# Altium PCB PCB1.PcbDoc (part 1 of 2)
Units mil, origin at the board's own origin, x right, y up, seen from the top; angles counter-clockwise.
Board outline 6299.21 x 3937.01 mil, 2 copper layers (Top Layer, Bottom Layer); 110 components, 74 nets, 374 pads, 104 vias.
Unrouted connection lines stored in the file: 41.
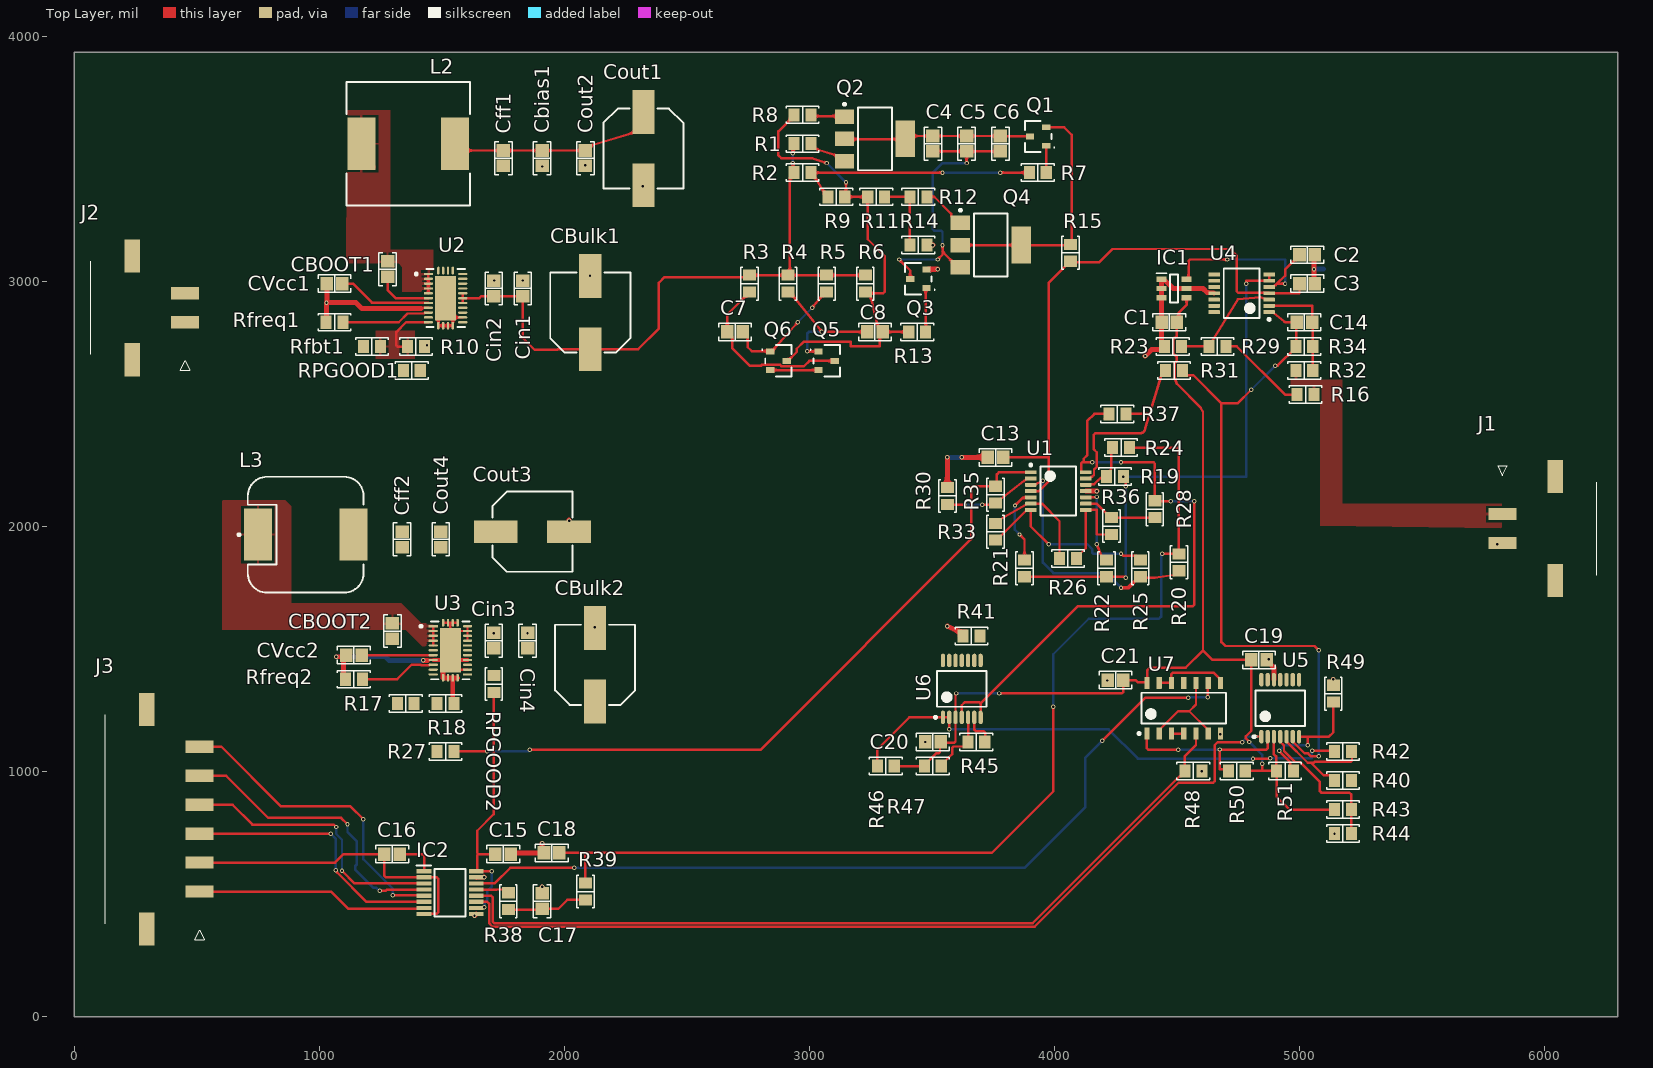
[diagram p0: Top Layer view]
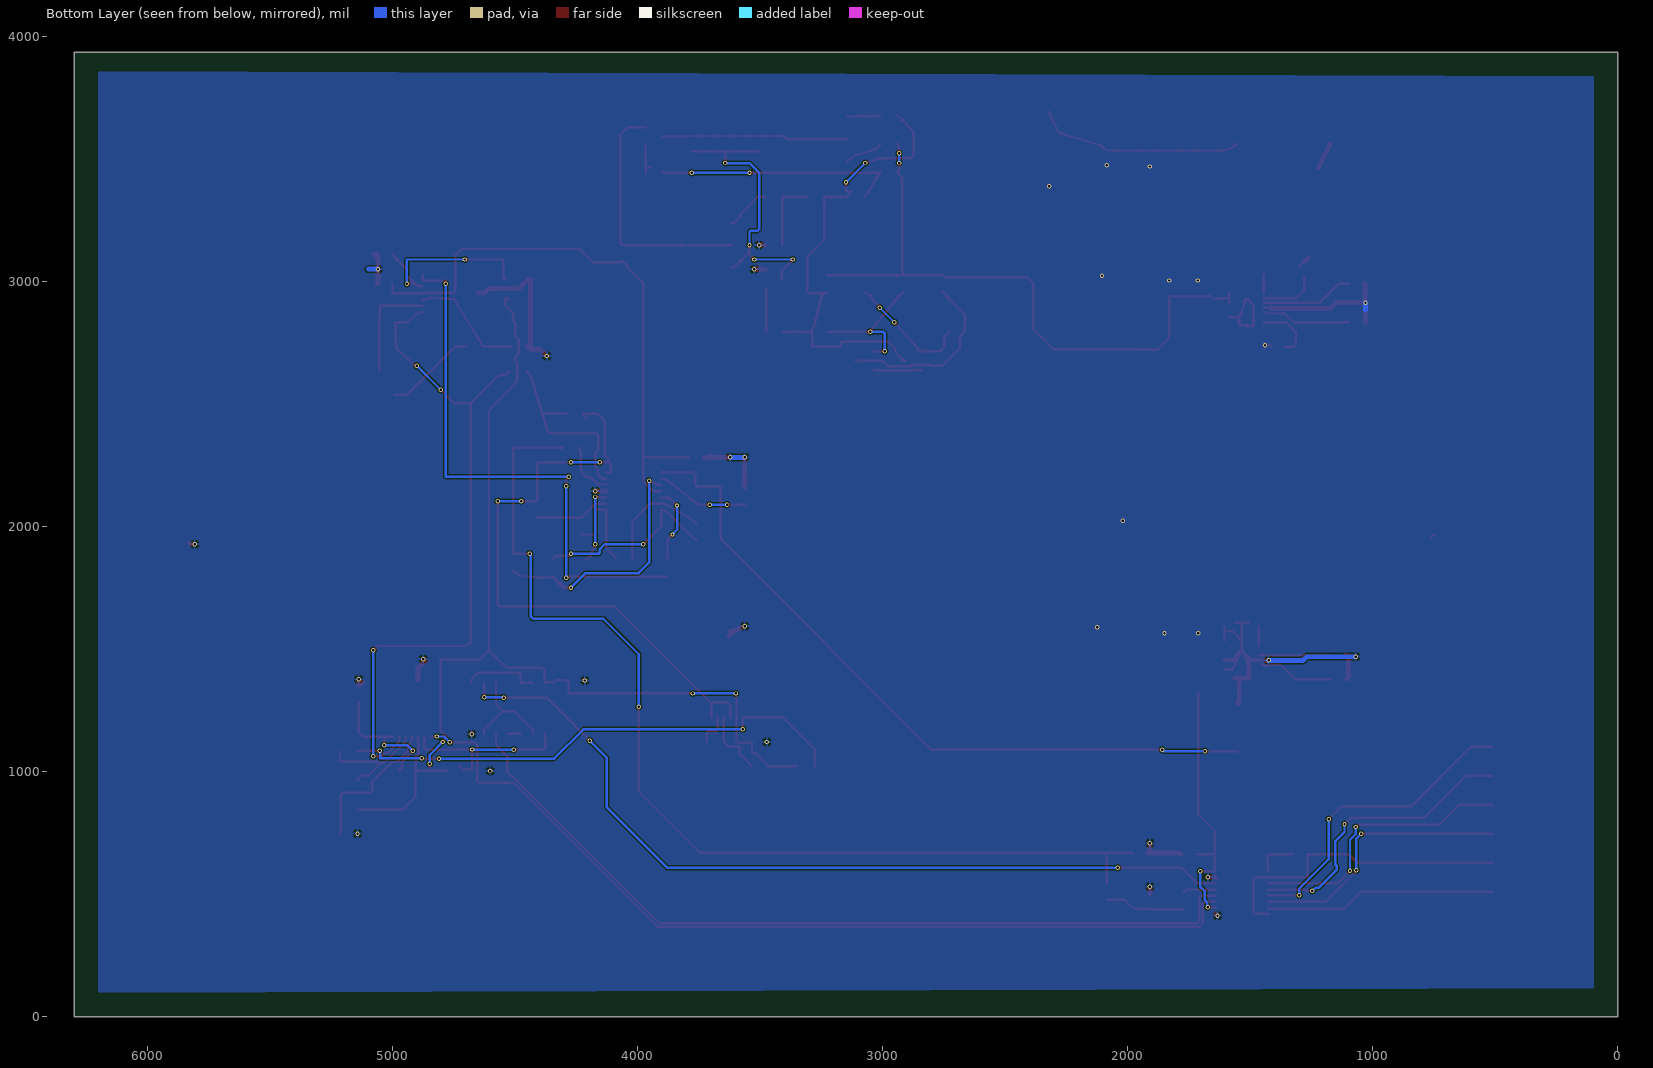
[diagram p1: Bottom Layer view, seen from below]
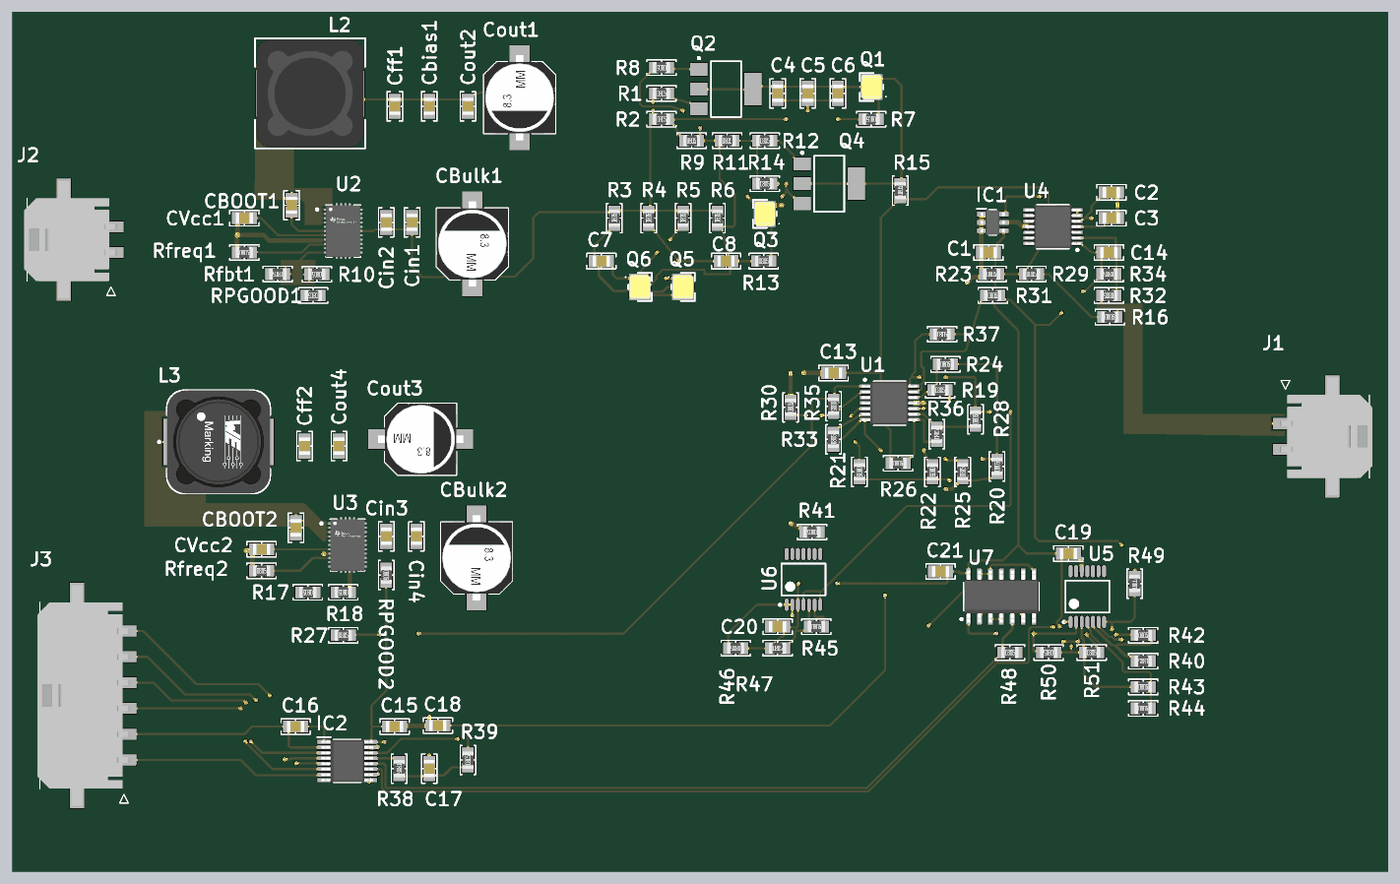
[diagram p2: 3D render of the assembled board from above, using the file's embedded part models]

## Layer stack, top to bottom
Top Solder: solder mask 0.4, Solder Resist, Dk 3.5
Top Layer: signal copper 1.4
Dielectric 1: dielectric 12.6, FR-4, Dk 4.8
Bottom Layer: signal copper 1.4
Bottom Solder: solder mask 0.4, Solder Resist, Dk 3.5

## Board outline
0,0 6299.21,0 6299.21,3937.01 0,3937.01

## Design rules (kind name [scope] priority, off if disabled: settings)
Clearance [All] p1: gap=4.92 ignorepadtopadclearanceinfootprint=FALSE
PolygonConnect [All] p1: connectstyle=Relief reliefconductorwidth=10 reliefentries=4 polygonreliefangle="90 Angle" airgapwidth=10
RoutingVias [All] p1: holewidth=10 width=18 viastyle="Through Hole" minholewidth=8 minwidth=16 maxholewidth=20 maxwidth=28
SolderMaskExpansion [All] p1: expansion=4 istentingtop=FALSE
Width [All] p1: maxlimit=20 minlimit=5 preferedwidth=10
30 further rules are at their usual default settings.

## Components (designator, comment, footprint, x,y, rotation, side; value= is the part's Value field where it differs from the comment)
C1 "0.1 µF" "CAP 0805_2012" 4468.5,2834.65 r180 top
C2 "1 µF" "CAP 0805_2012" 5031.5,3110.24 r180 top
C3 "0.1 µF" "CAP 0805_2012" 5031.5,2992.13 r180 top
C4 "1u" "CAP 0805_2012" 3503.94,3562.99 r90 top
C5 "1u" "CAP 0805_2012" 3641.73,3562.99 r90 top
C6 "1u" "CAP 0805_2012" 3779.53,3562.99 r90 top
C7 "4700 pF" "CAP 0805_2012" 2696.85,2795.28 r0 top
C8 "4700 pF" "CAP 0805_2012" 3267.72,2795.28 r0 top
C13 "0.1 µF" "CAP 0805_2012" 3759.84,2283.46 r0 top
C14 "0.13 µF" "CAP 0805_2012" 5019.69,2834.65 r180 top
C15 "0.1 µF" "CAP 0805_2012" 1750.65,664.84 r180 top
C16 "0.1 µF" "CAP 0805_2012" 1297.89,664.84 r180 top
C17 "0.1 µF" "CAP 0805_2012" 1909.45,472.44 r270 top
C18 "0.1 µF" "CAP 0805_2012" 1948.82,669.29 r0 top
C19 "0.1 µF" "CAP 0805_2012" 4834.65,1456.69 r0 top
C20 "0.1 µF" "CAP 0805_2012" 3503.94,1122.05 r0 top
C21 "0.1 µF" "CAP 0805_2012" 4249.21,1374.8 r0 top
Cbias1 "1uF" "CAP 0805_2012" 1909.45,3503.94 r90 top
CBOOT1 "0.47 µF" "CAP 0805_2012" 1279.53,3051.18 r270 top
CBOOT2 "0.47 µF" "CAP 0805_2012" 1299.21,1574.8 r270 top
CBulk1 "68 µF" "CAP ALSMD 8.3MM H10.5MM" 2106.3,2874.02 r90 top
CBulk2 "22uF" "CAP ALSMD 8.3MM H10.5MM" 2125.98,1437.01 r90 top value="68 µF"
Cff1 "11pF" "CAP 0805_2012" 1751.97,3503.94 r90 top
Cff2 "11pF" "CAP 0805_2012" 1338.58,1948.82 r90 top
Cin1 "10uF" "CAP 0805_2012" 1830.71,2972.44 r90 top
Cin2 "47nF" "CAP 0805_2012" 1712.6,2972.44 r90 top
Cin3 "10uF" "CAP 0805_2012" 1712.6,1535.43 r90 top
Cin4 "47nF" "CAP 0805_2012" 1850.39,1535.43 r90 top
Cout1 "68 µF" "CAP ALSMD 8.3MM H10.5MM" 2322.83,3543.31 r270 top
Cout2 "0.47uF" "CAP 0805_2012" 2086.61,3503.94 r90 top
Cout3 "22uF" "CAP ALSMD 8.3MM H10.5MM" 1870,1980 r0 top value="68 µF"
Cout4 "0.47uF" "CAP 0805_2012" 1496.06,1948.82 r90 top
CVcc1 "2.2uF" "CAP 0805_2012" 1062.99,2992.13 r180 top
CVcc2 "2.2uF" "CAP 0805_2012" 1141.73,1476.38 r180 top
IC1 "LT6656AIS6-2.5#TRMPBF" SOT95P280X100-6N 4488.19,2972.44 r0 top
IC2 "ISO7741QDBQQ1" SOP64P600X175-16N 1534.11,507.36 r0 top
J1 "43650-0214" 43650-02(12,13,14) 5827.95,1992.72 r90 top
J2 "43650-0214" 43650-02(12,13,14) 452.76,2893.7 r270 top
J3 "43650-0614" 43650-06(12,13,14) 511.81,807.09 r270 top
L2 "3.3 µH" "BOURNS SRR1280" 1364.17,3562.99 r0 top
L3 "2.2 µH" "WURTH WE-PD 1210" 944.88,1968.5 r0 top
Q1 "2N2222AUB" MCSM-2N2222AUB-3 3933.46,3592.52 r90 top
Q2 "PZT2907AT1G" ONSC-SOT-223-4-318E-04_V 3267.72,3582.68 r0 top
Q3 "2N2222AUB" MCSM-2N2222AUB-3 3444.88,3011.81 r90 top
Q4 "PZT2907AT1G" ONSC-SOT-223-4-318E-04_V 3740.16,3149.61 r0 top
Q5 "2N2222AUB" MCSM-2N2222AUB-3 3070.87,2677.17 r270 top
Q6 "2N2222AUB" MCSM-2N2222AUB-3 2874.02,2677.17 r270 top
R1 "243 Ohms" "RES 0805_2012" 2972.44,3562.99 r0 top
R2 "1.1 kOhms" "RES 0805_2012" 2972.44,3444.88 r0 top
R3 "1 kOhms" "RES 0805_2012" 2755.91,2992.13 r90 top
R4 "4.7 kOhms" "RES 0805_2012" 2913.39,2992.13 r90 top
R5 "4.7 kOhms" "RES 0805_2012" 3070.87,2992.13 r90 top
R6 "1 kOhms" "RES 0805_2012" 3228.35,2992.13 r90 top
R7 "13 Ohms" "RES 0805_2012" 3932.09,3444.88 r180 top
R8 "1.1 kOhms" "RES 0805_2012" 2972.44,3681.1 r180 top
R9 "1.1 kOhms" "RES 0805_2012" 3110.24,3346.46 r0 top
R10 "24.9KOhms" "RES 0805_2012" 1395,2735 r180 top
R11 "1.1 kOhms" "RES 0805_2012" 3272.64,3346.46 r0 top
R12 "13 Ohms" "RES 0805_2012" 3444.88,3346.46 r0 top
R13 "1.1 kOhms" "RES 0805_2012" 3439.96,2795.28 r0 top
R14 "1.1 kOhms" "RES 0805_2012" 3444.88,3149.61 r0 top
R15 "243 Ohms" "RES 0805_2012" 4064.96,3118.11 r90 top
R16 "20 mOhms" "RES 0805_2012" 5024.61,2539.37 r0 top
R17 "261ohms" "RES 0805_2012" 1353.35,1279.53 r180 top
R18 "8060 Ohms" "RES 0805_2012" 1515.75,1279.53 r180 top
R19 "1 kOhms" "RES 0805_2012" 4247.05,2204.72 r0 top
R20 "1 kOhms" "RES 0805_2012" 4507.87,1855.32 r90 top
R21 "500 Ohms" "RES 0805_2012" 3877.95,1830.71 r270 top
R22 "667 Ohms" "RES 0805_2012" 4212.6,1830.71 r270 top
R23 "24.9 kOhms" "RES 0805_2012" 4483.27,2736.22 r0 top
R24 "1 kOhms" "RES 0805_2012" 4271.65,2322.83 r0 top
R25 "1 kOhms" "RES 0805_2012" 4350.39,1830.71 r90 top
R26 "1 kOhms" "RES 0805_2012" 4055.12,1870.08 r0 top
R27 "30900 Ohms" "RES 0805_2012" 1515.75,1082.68 r0 top
R28 "2 kOhms" "RES 0805_2012" 4409.45,2071.85 r90 top
R29 "1 kOhms" "RES 0805_2012" 4665.35,2736.22 r0 top
R30 "1 kOhms" "RES 0805_2012" 3562.99,2125.98 r90 top
R31 "1 kOhms" "RES 0805_2012" 4488.19,2637.8 r0 top
R32 "1 kOhms" "RES 0805_2012" 5019.69,2637.8 r180 top
R33 "1 kOhms" "RES 0805_2012" 3759.65,1979.81 r90 top
R34 "24.9 kOhms" "RES 0805_2012" 5019.69,2736.22 r180 top
R35 "1 kOhms" "RES 0805_2012" 3759.84,2130.91 r270 top
R36 "1 kOhms" "RES 0805_2012" 4232.28,2002.95 r90 top
R37 "1 kOhms" "RES 0805_2012" 4256.89,2460.63 r0 top
R38 "18 kOhms" "RES 0805_2012" 1771.65,472.44 r270 top
R39 "18 kOhms" "RES 0805_2012" 2086.61,511.81 r90 top
R40 "10 kOhms" "RES 0805_2012" 5177.17,964.57 r180 top
R41 "1.13 MOhms" "RES 0805_2012" 3661.42,1555.12 r180 top
R42 "10 kOhms" "RES 0805_2012" 5177.17,1082.68 r0 top
R43 "100 kOhms" "RES 0805_2012" 5177.17,846.46 r0 top
R44 "400 kOhms" "RES 0805_2012" 5177.17,748.03 r0 top
R45 "250 kOhms" "RES 0805_2012" 3681.1,1122.05 r0 top
R46 "5 kOhms" "RES 0805_2012" 3312.01,1023.62 r180 top
R47 "1.13 MOhms" "RES 0805_2012" 3503.94,1023.62 r0 top
R48 "10 kOhms" "RES 0805_2012" 4566.93,1003.94 r0 top
R49 "18 kOhms" "RES 0805_2012" 5137.8,1318.9 r90 top
R50 "10 kOhms" "RES 0805_2012" 4744.09,1003.94 r180 top
R51 "18 kOhms" "RES 0805_2012" 4940.94,1003.94 r0 top
Rfbt1 "100 kOhms" "RES 0805_2012" 1215.55,2736.22 r180 top
Rfreq1 "78.7kOhms" "RES 0805_2012" 1062.99,2834.65 r0 top
Rfreq2 "78.7kOhms" "RES 0805_2012" 1141.73,1377.95 r0 top
RPGOOD1 "100 kOhms" "RES 0805_2012" 1377.95,2637.8 r180 top
RPGOOD2 "100 kOhms" "RES 0805_2012" 1712.6,1358.27 r270 top
U1 "OPA4140AIPWR" PW0014A_L 4015.75,2145.67 r0 top
U2 "LM73606QRNPTQ1" FP-RNP0030A-IPC_C 1515.75,2933.07 r0 top
U3 "LM73606QRNPTQ1" FP-RNP0030A-IPC_C 1535.43,1496.06 r0 top
U4 "OPA4140AIPWR" PW0014A_L 4763.78,2952.76 r180 top
U5 "TLV9034QPWRQ1" TSOP65P640X120-14N 4921.26,1259.84 r90 top
U6 "TLV9024PWRQ1" TSOP65P640X120-14N 3622.05,1338.58 r90 top
U7 "SN74HC00QDRQ1" D0014A_L 4527.56,1259.84 r90 top

## Footprints (in the part's own frame and the unit in brackets; to place one, negate y for a bottom-side part, rotate by r counter-clockwise, add the part's x,y. Pads: shape width x height; smd on the part's side, far side on the other; paste and mask are expansions set on the pad)
43650-02(12,13,14) [mm]
  rect 1.27x2.92 smd: 1(1.5,0) 2(-1.5,0)
  rect 3.43x1.65 smd: 3(5.385,-5.47) 4(-5.385,-5.47)
  silkscreen extent -4.82,-9.75 6.5,0.5, body extent -6.83,-10.09 6.83,0.65, height 5.68
43650-06(12,13,14) [mm]
  rect 1.27x2.92 smd: 1(7.5,0) 2(4.5,0) 3(1.5,0) 4(-1.5,0) 5(-4.5,0) 6(-7.5,0)
  rect 3.43x1.65 smd: 7(11.385,-5.47) 8(-11.385,-5.47)
  silkscreen extent -10.82,-9.75 12.5,0.5, body extent -12.82,-10.07 12.82,0.67, height 5.68
"BOURNS SRR1280" [mm] "Precision Wire Wound Inductor, 2-Leads, Body 12.50x12.50mm, IPC Medium Density"
  rect 2.9x5.4 smd: 1(-4.85,0) 2(4.85,0)
  silkscreen extent -6.4,-6.4 6.4,6.4, body extent -6.25,-6.25 6.25,6.25, height 7.9
"CAP 0805_2012" [mm] "Chip Capacitor, 2-Leads, Body 2.00x1.20mm, IPC Medium Density"
  rect 1.3x1.4 smd: 1(-0.8,0) 2(0.8,0)
  silkscreen extent -1.7,-0.9 1.7,0.9, body extent -1,-0.64 1,0.64, height 1.26
"CAP ALSMD 8.3MM H10.5MM" [mm] "Aluminum Electrolytic Capacitor, Body 8.30x8.30x10.50mm, IPC Low Density"
  rect 4.55x2.3 smd: 1(-3.8,0) 2(3.8,0)
  silkscreen extent -4.15,-4.15 4.15,4.15, body extent -4.95,-4.15 4.95,4.15, height 10.5
D0014A_L [mm] "SOIC, 14-Leads, Body 8.75x4mm, Pitch 1.27mm, IPC High Density"
  rrect18% 1.25x0.55 smd: 1(-2.625,3.81) 2(-2.625,2.54) 3(-2.625,1.27) 4(-2.625,0) 5(-2.625,-1.27) 6(-2.625,-2.54) 7(-2.625,-3.81) 8(2.625,-3.81) 9(2.625,-2.54) 10(2.625,-1.27) 11(2.625,0) 12(2.625,1.27) 13(2.625,2.54) 14(2.625,3.81)
  silkscreen extent -2.75,-4.38 1.6,4.76, body extent -3.02,-4.32 3.02,4.32, height 1.59
FP-RNP0030A-IPC_C [mm]
  rect 0.96x0.242 smd paste+0 mask+0: 1(-1.776,2.5)
  rrect100% 0.96x0.242 smd paste+0 mask+0: 2(-1.776,2) 3(-1.776,1.5) 4(-1.776,1) 5(-1.776,0.5) 6(-1.776,0) 7(-1.776,-0.5) 8(-1.776,-1) 9(-1.776,-1.5) 10(-1.776,-2) 11(-1.776,-2.5) 16(1.776,-2.5) 17(1.776,-2) 18(1.776,-1.5) 19(1.776,-1) 20(1.776,-0.5) 21(1.776,0) 22(1.776,0.5) 23(1.776,1) 24(1.776,1.5) 25(1.776,2) 26(1.776,2.5)
  rrect100% 0.242x0.806 smd paste+0 mask+0: 12(-0.75,-2.853) 13(-0.25,-2.853) 14(0.25,-2.853) 15(0.75,-2.853) 27(0.75,2.853) 28(0.25,2.853) 29(-0.25,2.853) 30(-0.75,2.853)
  rect 2.2x4.6 smd paste-1000 mask+0: 31(0,0)
  silkscreen extent -3.16,-3 2,3, body extent -2,-3 2,3, height 0.8
MCSM-2N2222AUB-3 [mm] "SMD, 3-Leads, Body 3.085x2.45mm, Pitch 0.955mm"
  rect 0.61x0.86 smd: 1(-0.955,-0.845) 2(0.955,-0.845) 3(0,0.845)
  silkscreen extent -1.63,-1.73 1.63,1.37, body extent -1.52,-1.27 1.52,1.27, height 1.27
ONSC-SOT-223-4-318E-04_V [mm] "SOT223, 4-Leads, Body 6.5x3.5mm, Pitch 2.3mm"
  rect 2x1.5 smd: 1(-3.15,2.3) 2(-3.15,0) 3(-3.15,-2.3)
  rect 2x3.8 smd: 4(3.15,0)
  silkscreen extent -3.27,-3.25 1.75,3.72, body extent -1.75,-3.25 1.75,3.25, height 1.75
PW0014A_L [mm] "SOP, 14-Leads, Body 5.1x4.5mm, Pitch 0.65mm, IPC High Density"
  rrect25% 1.2x0.4 smd: 1(-2.85,1.95) 2(-2.85,1.3) 3(-2.85,0.65) 4(-2.85,0) 5(-2.85,-0.65) 6(-2.85,-1.3) 7(-2.85,-1.95) 8(2.85,-1.95) 9(2.85,-1.3) 10(2.85,-0.65) 11(2.85,0) 12(2.85,0.65) 13(2.85,1.3) 14(2.85,1.95)
  silkscreen extent -2.97,-2.55 1.85,2.82, body extent -3.21,-2.5 3.21,2.5, height 1
"RES 0805_2012" [mm] "Chip Resistor, 2-Leads, Body 2.00x1.25mm, IPC Medium Density"
  rect 1.15x1.35 smd: 1(-0.875,0) 2(0.875,0)
  silkscreen extent -1.7,-0.9 1.7,0.9, body extent -1,-0.62 1,0.63, height 0.6
SOP64P600X175-16N [mm]
  rect 1.528x0.435 smd: 1(-2.711,2.222) 2(-2.711,1.588) 3(-2.711,0.952) 4(-2.711,0.318) 5(-2.711,-0.318) 6(-2.711,-0.952) 7(-2.711,-1.588) 8(-2.711,-2.222) 9(2.711,-2.222) 10(2.711,-1.588) 11(2.711,-0.952) 12(2.711,-0.318) 13(2.711,0.318) 14(2.711,0.952) 15(2.711,1.588) 16(2.711,2.222)
  silkscreen extent -3.47,-2.45 1.6,2.79, body extent -3.01,-2.45 3.01,2.45, height 1.62
SOT95P280X100-6N [mm]
  rect 1.05x0.55 smd: 1(-1.3,0.95) 2(-1.3,0) 3(-1.3,-0.95) 4(1.3,-0.95) 5(1.3,0) 6(1.3,0.95)
  silkscreen extent -1.83,-1.45 0.43,1.58, body extent -1.4,-1.45 1.4,1.45, height 1
TSOP65P640X120-14N [mm] "TSOP, 14-Leads, Body 5.00x4.40mm, Pitch 0.65mm, IPC Medium Density"
  oval 1.4x0.45 smd: 1(-2.95,1.95) 2(-2.95,1.3) 3(-2.95,0.65) 4(-2.95,0) 5(-2.95,-0.65) 6(-2.95,-1.3) 7(-2.95,-1.95) 8(2.95,-1.95) 9(2.95,-1.3) 10(2.95,-0.65) 11(2.95,0) 12(2.95,0.65) 13(2.95,1.3) 14(2.95,1.95)
  silkscreen extent -3.07,-2.55 1.85,2.85, body extent -2.25,-2.55 2.25,2.55, height 1.2
"WURTH WE-PD 1210" [mm] "SMT Shielded Power Inductor, 2-leads, body 12x12mm"
  rect 2.9x5.4 smd: 1(-4.95,-0.016) 2(4.95,-0.016)
  silkscreen extent -7.02,-6.02 6,5.98, body extent -6,-6.02 6,5.98, height 9.46

## Part data
C1 C3 C13: library part CC0805MRX7R9BB104, "CAP CER 0.1UF 50V X7R 0805", Device Package="0805 (2012 Metric)", manufacturer=Yageo, Operating Temperature="-55°C ~ 125°C", Supplier Part Number 1=311-4351-1-ND, Temperature Coefficient=X7R, Tolerance=±20%, Voltage - Rated=50V, Applications="General Purpose", Capacitance="0.1 µF", componentlink1description=Datasheet, componentlink1url=https://www.yageo.com/upload/media/product/productsearch/datasheet/mlcc/UPY-GPHC_X7R_6.3V-to-50V_18.pdf, componentlink2description="DigiKey Link", componentlink2url=https://www.digikey.com/en/products/detail/yageo/CC0805MRX7R9BB104/5884281, lastupdated="09-08-2023 19:14:28", Lifecycle Status=Active, Minimum Order=1, Mounting Type="Surface Mount, MLCC", Package / Case="0805 (2012 Metric)", packaging=TapeAndReel, Part Number=CC0805MRX7R9BB104, Part Status=Active, partid=2475, price=0.01, series=CC, Size / Dimension="0.079\" L x 0.049\" W (2.00mm x 1.25mm)", Supplier 1=DigiKey, Thickness (Max)="0.037\" (0.95mm)"
C2 C14: library part CC0805MRX7R9BB104, "CAP CER 0.1UF 50V X7R 0805", Capacitance="0.1 µF", Device Package="0805 (2012 Metric)", manufacturer=Yageo, Operating Temperature="-55°C ~ 125°C", Supplier Part Number 1=311-4351-1-ND, Temperature Coefficient=X7R, Tolerance=±20%, Voltage - Rated=50V, Applications="General Purpose", componentlink1description=Datasheet, componentlink1url=https://www.yageo.com/upload/media/product/productsearch/datasheet/mlcc/UPY-GPHC_X7R_6.3V-to-50V_18.pdf, componentlink2description="DigiKey Link", componentlink2url=https://www.digikey.com/en/products/detail/yageo/CC0805MRX7R9BB104/5884281, lastupdated="09-08-2023 19:14:28", Lifecycle Status=Active, Minimum Order=1, Mounting Type="Surface Mount, MLCC", Package / Case="0805 (2012 Metric)", packaging=TapeAndReel, Part Number=CC0805MRX7R9BB104, Part Status=Active, partid=2475, price=0.01, series=CC, Size / Dimension="0.079\" L x 0.049\" W (2.00mm x 1.25mm)", Supplier 1=DigiKey, Thickness (Max)="0.037\" (0.95mm)"
C4 C5 C6: library part C0805C472F3GECAUTO7210, "CAP CER 0805 4.7NF 25V C0G 1%", Capacitance="4700 pF", Device Package="0805 (2012 Metric)", manufacturer=KEMET, Operating Temperature="-55°C ~ 125°C", Ratings=AEC-Q200, Supplier Part Number 1=399-C0805C472F3GECAUTO7210CT-ND, Temperature Coefficient="C0G, NP0", Tolerance=±1%, Voltage - Rated=25V, Applications="Automotive, ESD Protection", componentlink1description=Datasheet, componentlink1url=https://connect.kemet.com:7667/gateway/IntelliData-ComponentDocumentation/1.0/download/datasheet/C0805C472F3GECAUTO7210, componentlink2description="DigiKey Link", componentlink2url=https://www.digikey.com/en/products/detail/kemet/C0805C472F3GECAUTO7210/8648690, Features="Low ESL", lastupdated="15-11-2023 20:12:00", Lifecycle Status=Active, Minimum Order=1, Mounting Type="Surface Mount, MLCC", Package / Case="0805 (2012 Metric)", packaging=TapeAndReel, Part Number=C0805C472F3GECAUTO7210, Part Status=Active, partid=54380, price=0.30, series="ESD SMD Auto C0G", Size / Dimension="0.079\" L x 0.049\" W (2.00mm x 1.25mm)", Supplier 1=DigiKey, Thickness (Max)="0.039\" (1.00mm)"
C7 C8: library part C0805C472F3GECAUTO7210, "CAP CER 0805 4.7NF 25V C0G 1%", Device Package="0805 (2012 Metric)", manufacturer=KEMET, Operating Temperature="-55°C ~ 125°C", Ratings=AEC-Q200, Supplier Part Number 1=399-C0805C472F3GECAUTO7210CT-ND, Temperature Coefficient="C0G, NP0", Tolerance=±1%, Voltage - Rated=25V, Applications="Automotive, ESD Protection", Capacitance="4700 pF", componentlink1description=Datasheet, componentlink1url=https://connect.kemet.com:7667/gateway/IntelliData-ComponentDocumentation/1.0/download/datasheet/C0805C472F3GECAUTO7210, componentlink2description="DigiKey Link", componentlink2url=https://www.digikey.com/en/products/detail/kemet/C0805C472F3GECAUTO7210/8648690, Features="Low ESL", lastupdated="15-11-2023 20:12:00", Lifecycle Status=Active, Minimum Order=1, Mounting Type="Surface Mount, MLCC", Package / Case="0805 (2012 Metric)", packaging=TapeAndReel, Part Number=C0805C472F3GECAUTO7210, Part Status=Active, partid=54380, price=0.30, series="ESD SMD Auto C0G", Size / Dimension="0.079\" L x 0.049\" W (2.00mm x 1.25mm)", Supplier 1=DigiKey, Thickness (Max)="0.039\" (1.00mm)"
C15 C16 C17 C18 C19 C20 C21: library part 250X15W104MV4E, "CAP CER 0.1UF 25V X7R 0805", Device Package="0805 (2012 Metric)", manufacturer="Johanson Dielectrics Inc.", Operating Temperature="-55°C ~ 125°C", Supplier Part Number 1=709-1330-1-ND, Temperature Coefficient=X7R, Tolerance=±20%, Voltage - Rated=25V, Applications="Bypass, Decoupling", Capacitance="0.1 µF", componentlink1description=Datasheet, componentlink1url=https://www.johansondielectrics.com/downloads/x2y-filter-and-decoupling-capacitors.pdf, componentlink2description="DigiKey Link", componentlink2url=https://www.digikey.com/en/products/detail/johanson-dielectrics-inc/250X15W104MV4E/2327204, Features="Low ESL (X2Y)", lastupdated="01-11-2023 19:15:18", Lifecycle Status=Active, Minimum Order=1, Mounting Type="Surface Mount, MLCC", Package / Case="0805 (2012 Metric)", packaging=TapeAndReel, Part Number=250X15W104MV4E, Part Status=Active, partid=44301, price=0.17, series=X2Y®, Size / Dimension="0.080\" L x 0.050\" W (2.03mm x 1.27mm)", Supplier 1=DigiKey, Thickness (Max)="0.040\" (1.02mm)"
Cbias1 CBOOT1 CBOOT2 Cff1 Cff2 Cin1 Cin2 Cin3 Cin4 Cout2 Cout4 CVcc1 CVcc2: library part 250X15W104MV4E, "CAP CER 0.1UF 25V X7R 0805", Capacitance="0.1 µF", Device Package="0805 (2012 Metric)", manufacturer="Johanson Dielectrics Inc.", Operating Temperature="-55°C ~ 125°C", Supplier Part Number 1=709-1330-1-ND, Temperature Coefficient=X7R, Tolerance=±20%, Voltage - Rated=25V, Applications="Bypass, Decoupling", componentlink1description=Datasheet, componentlink1url=https://www.johansondielectrics.com/downloads/x2y-filter-and-decoupling-capacitors.pdf, componentlink2description="DigiKey Link", componentlink2url=https://www.digikey.com/en/products/detail/johanson-dielectrics-inc/250X15W104MV4E/2327204, Features="Low ESL (X2Y)", lastupdated="01-11-2023 19:15:18", Lifecycle Status=Active, Minimum Order=1, Mounting Type="Surface Mount, MLCC", Package / Case="0805 (2012 Metric)", packaging=TapeAndReel, Part Number=250X15W104MV4E, Part Status=Active, partid=44301, price=0.17, series=X2Y®, Size / Dimension="0.080\" L x 0.050\" W (2.03mm x 1.27mm)", Supplier 1=DigiKey, Thickness (Max)="0.040\" (1.02mm)"
CBulk1 Cout1: library part EEE-FK1J680UP, "CAP ALUM 68UF 20% 63V SMD", Device Package="Radial, Can - SMD", Lifetime @ Temp.="2000 Hrs @ 105°C", manufacturer="Panasonic Electronic Components", Operating Temperature="-55°C ~ 105°C", Ratings=AEC-Q200, Ripple Current @ High Frequency="250 mA @ 100 kHz", Ripple Current @ Low Frequency="187.5 mA @ 120 Hz", Supplier Part Number 1=PCE4307CT-ND, Tolerance=±20%, Voltage - Rated="63 V", Applications=Automotive, Capacitance="68 µF", componentlink2description="DigiKey Link", componentlink2url=https://www.digikey.com/en/products/detail/panasonic-electronic-components/EEE-FK1J680UP/949812, Height - Seated (Max)="0.413\" (10.50mm)", Impedance="650 mOhms", lastupdated="06-07-2023 20:33:13", Lifecycle Status=Active, Minimum Order=1, Mounting Type="Surface Mount", Package / Case="Radial, Can - SMD", packaging=TapeAndReel, Part Number=EEE-FK1J680UP, Part Status=Active, partid=7487, Polarization=Polar, price=0.26, series=FK, Size / Dimension="0.315\" Dia (8.00mm)", Supplier 1=DigiKey, Surface Mount Land Size="0.327\" L x 0.327\" W (8.30mm x 8.30mm)"
CBulk2 Cout3: library part EEE-FK1J680UP, "CAP ALUM 68UF 20% 63V SMD", Capacitance="68 µF", Device Package="Radial, Can - SMD", Lifetime @ Temp.="2000 Hrs @ 105°C", manufacturer="Panasonic Electronic Components", Operating Temperature="-55°C ~ 105°C", Ratings=AEC-Q200, Ripple Current @ High Frequency="250 mA @ 100 kHz", Ripple Current @ Low Frequency="187.5 mA @ 120 Hz", Supplier Part Number 1=PCE4307CT-ND, Tolerance=±20%, Voltage - Rated="63 V", Applications=Automotive, componentlink2description="DigiKey Link", componentlink2url=https://www.digikey.com/en/products/detail/panasonic-electronic-components/EEE-FK1J680UP/949812, Height - Seated (Max)="0.413\" (10.50mm)", Impedance="650 mOhms", lastupdated="06-07-2023 20:33:13", Lifecycle Status=Active, Minimum Order=1, Mounting Type="Surface Mount", Package / Case="Radial, Can - SMD", packaging=TapeAndReel, Part Number=EEE-FK1J680UP, Part Status=Active, partid=7487, Polarization=Polar, price=0.26, series=FK, Size / Dimension="0.315\" Dia (8.00mm)", Supplier 1=DigiKey, Surface Mount Land Size="0.327\" L x 0.327\" W (8.30mm x 8.30mm)"
IC1: "Integrated Circuit", Manufacturer_Name="Analog Devices", Mouser Part Number=584-6656AIS6-2.5TMPF, Arrow Part Number=LT6656AIS6-2.5#TRMPBF, Arrow Price/Stock=https://www.arrow.com/en/products/lt6656ais6-2.5trmpbf/analog-devices?region=nac, Datasheet Link=https://datasheet.datasheetarchive.com/originals/distributors/Datasheets_SAMA/d53d0df16fa3c9e3cd0282524dab6a3f.pdf, Height=1mm, Manufacturer_Part_Number=LT6656AIS6-2.5#TRMPBF, Mouser Price/Stock=https://www.mouser.co.uk/ProductDetail/Analog-Devices/LT6656AIS6-25TRMPBF?qs=hVkxg5c3xu%252BJt7EHt6GCkQ%3D%3D
IC2: "Integrated Circuit", Manufacturer_Name="Texas Instruments", Mouser Part Number=595-ISO7741QDBQQ1, Arrow Part Number=ISO7741QDBQQ1, Arrow Price/Stock=https://www.arrow.com/en/products/iso7741qdbqq1/texas-instruments, Datasheet Link=http://www.ti.com/lit/gpn/iso7741-q1, Height=1.75mm, Manufacturer_Part_Number=ISO7741QDBQQ1, Mouser Price/Stock=https://www.mouser.co.uk/ProductDetail/Texas-Instruments/ISO7741QDBQQ1?qs=5aG0NVq1C4w%252Bshfa2Wpgcw%3D%3D
J1 J2: "Connector", Manufacturer_Name=Molex, Mouser Part Number=538-43650-0214, Datasheet Link=https://www.molex.com/pdm_docs/sd/436500212_sd.pdf, Height=5.57mm, Manufacturer_Part_Number=43650-0214, Mouser Price/Stock=https://www.mouser.co.uk/ProductDetail/Molex/43650-0214?qs=z57USrEQgt1S%2Fhgsj%2FblDA%3D%3D
J3: "Connector", Manufacturer_Name=Molex, Mouser Part Number=538-43650-0614, Datasheet Link=https://www.molex.com/pdm_docs/sd/436500212_sd.pdf, Height=5.57mm, Manufacturer_Part_Number=43650-0614, Mouser Price/Stock=https://www.mouser.com/Search/Refine.aspx?Keyword=538-43650-0614
L2: library part SRR1280-3R3Y, "FIXED IND 3.3UH 8.8A 12 MOHM SMD", Current - Saturation=9.8A, Current Rating (Amps)="8.8 A", DC Resistance (DCR)="12mOhm Max", Device Package=Nonstandard, Frequency - Self Resonant=40MHz, Inductance Frequency - Test="100 kHz", manufacturer="Bourns Inc.", Operating Temperature="-40°C ~ 125°C", Q @ Freq="20 @ 7.96MHz", Supplier Part Number 1=SRR1280-3R3YCT-ND, Tolerance=±30%, componentlink1description=Datasheet, componentlink1url=https://www.bourns.com/docs/Product-Datasheets/SRR1280.pdf, componentlink2description="DigiKey Link", componentlink2url=https://www.digikey.com/en/products/detail/bourns-inc/SRR1280-3R3Y/2562410, Height - Seated (Max)="0.315\" (8.00mm)", Inductance="3.3 µH", lastupdated="12/29/2023 9:30:16 PM", Lifecycle Status=Active, Material - Core=Ferrite, Minimum Order=1, Mounting Type="Surface Mount", Package / Case=Nonstandard, packaging=TapeAndReel, Part Number=SRR1280-3R3Y, Part Status=Active, partid=17, price=0.51, series=SRR1280, Shielding=Shielded, Size / Dimension="0.492\" L x 0.492\" W (12.50mm x 12.50mm)", Supplier 1=DigiKey, Type="Drum Core, Wirewound"
L3: library part 7447709002, "FIXED IND 2.2UH 11.5A 6 MOHM SMD", Current - Saturation=20A, Current Rating (Amps)="11.5 A", DC Resistance (DCR)="6mOhm Max", Device Package=Nonstandard, Frequency - Self Resonant=65MHz, Inductance Frequency - Test="1 kHz", manufacturer="Würth Elektronik", Operating Temperature="-40°C ~ 125°C", Ratings=AEC-Q200, Supplier Part Number 1=732-7447709002CT-ND, Tolerance=±20%, componentlink1description=Datasheet, componentlink1url=https://katalog.we-online.de/pbs/datasheet/7447709002.pdf, componentlink2description="DigiKey Link", componentlink2url=https://www.digikey.com/en/products/detail/würth-elektronik/7447709002/1638642, Height - Seated (Max)="0.394\" (10.00mm)", Inductance="2.2 µH", lastupdated="1/19/2024 9:56:38 PM", Lifecycle Status=Active, Material - Core=Ferrite, Minimum Order=1, Mounting Type="Surface Mount", Package / Case=Nonstandard, packaging=TapeAndReel, Part Number=7447709002, Part Status=Active, partid=5671, price=1.48, series=WE-PD, Shielding=Shielded, Size / Dimension="0.472\" L x 0.472\" W (12.00mm x 12.00mm)", Supplier 1=DigiKey, Type="Drum Core, Wirewound"
Q1 Q3 Q5 Q6: library part CMP-2000-07613-1, "NPN Transistor, 50 V, 0.8 A, -65 to 200 degC, 3-Pin SMD, Tray", manufacturer=Microsemi, Maximum Collector Base Voltage=75V, Maximum Collector Emitter Saturation Voltage=0.3@15mA@150mA, Maximum Collector Emitter Voltage=50V, Maximum DC Collector Current=0.8A, Maximum Power Dissipation=500mW, Minimum DC Current Gain=50@0.1mA@10V, Operating Temperature=-65to200°C, Package=3UB, Package Description="3-Pin Surface Mount Device, Body 3.085 x 2.45 mm, Pitch 0.955 mm", Category=GPBJT, Datasheet URL=http://datasheet.octopart.com/2N2222AUB-Microsemi-datasheet-11765791.pdf, Datasheet Version="Rev. 2, 03/2010", Manufacturer URL=http://www.microsemi.com/, Mounting=SurfaceMount, Package Reference=2N2222AUB, packaging=WafflePack, Pin Count=3, Rad Hard=No, Type=NPN
Q2 Q4: library part CMP-1048-00010-1, "PNP Silicon Epitaxial Transistor, 4-Pin SOT-223, Pb-Free, Tape and Reel", manufacturer="On Semiconductor", componentlink1description="Manufacturer URL", componentlink1url=http://www.onsemi.com/, componentlink2description=Datasheet, componentlink2url=http://www.onsemi.com/pub_link/Collateral/PZT2907AT1-D.PDF, ComponentLink3Description="Package Specification", ComponentLink3URL=http://www.onsemi.com/pub_link/Collateral/318E-04.PDF, DatasheetVersion="Rev. 10", fT Min (MHz)=200, IC Continuous (A)=-0.6, Mounting Technology="Surface Mount", PackageDescription="4-Pin Small Outline Transistor, Body 6.5 x 3.5 mm, Pitch 2.3 mm", PackageReference=SOT-223-4-318E-04, PackageVersion="Rev. N, 08/2009", Packing="Tape and Reel", PartNumber=PZT2907AT1G, Polarity=PNP, RoHS=TRUE
R1 R2 R3 R6 R7 R8 R9 R11 R12 R13 R14 R15: library part AC0805FR-074K7L, "RES SMD 4.7K OHM 1% 1/8W 0805", Device Package="0805 (2012 Metric)", manufacturer=Yageo, Operating Temperature="-55°C ~ 155°C", Power (Watts)="0.125W, 1/8W", Ratings=AEC-Q200, Resistance="4.7 kOhms", Supplier Device Package=0805, Supplier Part Number 1=YAG3738CT-ND, Temperature Coefficient=±100ppm/°C, Tolerance=±1%, componentlink1description=Datasheet, componentlink1url=https://www.yageo.com/upload/media/product/productsearch/datasheet/rchip/PYu-AC_51_RoHS_L_7.pdf, componentlink2description="DigiKey Link", componentlink2url=https://www.digikey.com/en/products/detail/yageo/AC0805FR-074K7L/5896876, Composition="Thick Film", Features="Automotive AEC-Q200, Moisture Resistant", Height - Seated (Max)="0.024\" (0.60mm)", lastupdated="14-11-2023 20:58:50", Lifecycle Status=Active, Minimum Order=1, Number of Terminations=2, Package / Case="0805 (2012 Metric)", packaging=TapeAndReel, Part Number=AC0805FR-074K7L, Part Status=Active, partid=34661, price=0.01, series=AC, Size / Dimension="0.079\" L x 0.049\" W (2.00mm x 1.25mm)", Supplier 1=DigiKey
R4 R5: library part AC0805FR-074K7L, "RES SMD 4.7K OHM 1% 1/8W 0805", Device Package="0805 (2012 Metric)", manufacturer=Yageo, Operating Temperature="-55°C ~ 155°C", Power (Watts)="0.125W, 1/8W", Ratings=AEC-Q200, Supplier Device Package=0805, Supplier Part Number 1=YAG3738CT-ND, Temperature Coefficient=±100ppm/°C, Tolerance=±1%, componentlink1description=Datasheet, componentlink1url=https://www.yageo.com/upload/media/product/productsearch/datasheet/rchip/PYu-AC_51_RoHS_L_7.pdf, componentlink2description="DigiKey Link", componentlink2url=https://www.digikey.com/en/products/detail/yageo/AC0805FR-074K7L/5896876, Composition="Thick Film", Features="Automotive AEC-Q200, Moisture Resistant", Height - Seated (Max)="0.024\" (0.60mm)", lastupdated="14-11-2023 20:58:50", Lifecycle Status=Active, Minimum Order=1, Number of Terminations=2, Package / Case="0805 (2012 Metric)", packaging=TapeAndReel, Part Number=AC0805FR-074K7L, Part Status=Active, partid=34661, price=0.01, Resistance="4.7 kOhms", series=AC, Size / Dimension="0.079\" L x 0.049\" W (2.00mm x 1.25mm)", Supplier 1=DigiKey
R10 R17 R18 R21 R22 R27 R28 R38 R39 R40 R41 R42 R43 R44 R45 R46 R47 R48 R49 R50 R51 Rfbt1 Rfreq1 Rfreq2 RPGOOD1 RPGOOD2: library part 1-2176092-8, "RES SMD 1K OHM 0.1% 1/4W 0805", Device Package="0805 (2012 Metric)", manufacturer="TE Connectivity Passive Product", Operating Temperature="-55°C ~ 155°C", Power (Watts)="0.25W, 1/4W", Resistance="1 kOhms", Supplier Device Package=0805, Supplier Part Number 1=A110543CT-ND, Temperature Coefficient=±25ppm/°C, Tolerance=±0.1%, componentlink1description=Datasheet, componentlink1url=https://www.te.com/commerce/DocumentDelivery/DDEController?Action=srchrtrv&DocNm=1773272&DocType=DS&DocLang=English, componentlink2description="DigiKey Link", componentlink2url=https://www.digikey.com/en/products/detail/te-connectivity-passive-product/1-2176092-8/4034011, Composition="Thin Film", Height - Seated (Max)="0.026\" (0.65mm)", lastupdated="16-11-2023 20:53:44", Lifecycle Status=Active, Minimum Order=1, Number of Terminations=2, Package / Case="0805 (2012 Metric)", packaging=TapeAndReel, Part Number=1-2176092-8, Part Status=Active, partid=28484, price=0.14, series="RP73P, Holsworthy", Size / Dimension="0.079\" L x 0.049\" W (2.00mm x 1.25mm)", Supplier 1=DigiKey
R16: library part CFN0805-FX-R020ELF, "RES 0.02 OHM 1% 3/4W 0805", Device Package="0805 (2012 Metric)", manufacturer="Bourns Inc.", Operating Temperature="-55°C ~ 155°C", Power (Watts)="0.75W, 3/4W", Supplier Device Package=0805, Supplier Part Number 1=CFN0805-FX-R020ELFCT-ND, Temperature Coefficient=±100ppm/°C, Tolerance=±1%, componentlink1description=Datasheet, componentlink1url=//media.digikey.com/pdf/Data%20Sheets/Bourns%20PDFs/CFN_Series_Metal_Foil_DS.pdf, componentlink2description="DigiKey Link", componentlink2url=https://www.digikey.com/en/products/detail/bourns-inc/CFN0805-FX-R020ELF/9924212, Composition="Metal Foil", Features="Current Sense, Moisture Resistant", Height - Seated (Max)="0.035\" (0.90mm)", lastupdated="16-11-2023 20:52:47", Lifecycle Status=Active, Minimum Order=1, Number of Terminations=2, Package / Case="0805 (2012 Metric)", packaging=TapeAndReel, Part Number=CFN0805-FX-R020ELF, Part Status=Active, partid=45424, price=0.08, Resistance="20 mOhms", series=CFN, Size / Dimension="0.079\" L x 0.049\" W (2.00mm x 1.25mm)", Supplier 1=DigiKey
R19 R20 R24 R25 R26 R29 R30 R31 R32 R33 R35 R36 R37: library part 1-2176092-8, "RES SMD 1K OHM 0.1% 1/4W 0805", Device Package="0805 (2012 Metric)", manufacturer="TE Connectivity Passive Product", Operating Temperature="-55°C ~ 155°C", Power (Watts)="0.25W, 1/4W", Supplier Device Package=0805, Supplier Part Number 1=A110543CT-ND, Temperature Coefficient=±25ppm/°C, Tolerance=±0.1%, componentlink1description=Datasheet, componentlink1url=https://www.te.com/commerce/DocumentDelivery/DDEController?Action=srchrtrv&DocNm=1773272&DocType=DS&DocLang=English, componentlink2description="DigiKey Link", componentlink2url=https://www.digikey.com/en/products/detail/te-connectivity-passive-product/1-2176092-8/4034011, Composition="Thin Film", Height - Seated (Max)="0.026\" (0.65mm)", lastupdated="16-11-2023 20:53:44", Lifecycle Status=Active, Minimum Order=1, Number of Terminations=2, Package / Case="0805 (2012 Metric)", packaging=TapeAndReel, Part Number=1-2176092-8, Part Status=Active, partid=28484, price=0.14, Resistance="1 kOhms", series="RP73P, Holsworthy", Size / Dimension="0.079\" L x 0.049\" W (2.00mm x 1.25mm)", Supplier 1=DigiKey
R23 R34: library part 1-2176091-0, "RES SMD 71.5 OHM 0.1% 1/4W 0805", Device Package="0805 (2012 Metric)", manufacturer="TE Connectivity Passive Product", Operating Temperature="-55°C ~ 155°C", Power (Watts)="0.25W, 1/4W", Resistance="71.5 Ohms", Supplier Device Package=0805, Supplier Part Number 1=A110433CT-ND, Temperature Coefficient=±25ppm/°C, Tolerance=±0.1%, componentlink1description=Datasheet, componentlink1url=https://www.te.com/commerce/DocumentDelivery/DDEController?Action=srchrtrv&DocNm=1773272&DocType=DS&DocLang=English, componentlink2description="DigiKey Link", componentlink2url=https://www.digikey.com/en/products/detail/te-connectivity-passive-product/1-2176091-0/4033901, Composition="Thin Film", Height - Seated (Max)="0.026\" (0.65mm)", lastupdated="09-08-2023 20:16:52", Lifecycle Status=Active, Minimum Order=1, Number of Terminations=2, Package / Case="0805 (2012 Metric)", packaging=TapeAndReel, Part Number=1-2176091-0, Part Status=Active, partid=47593, price=0.14, series="RP73P, Holsworthy", Size / Dimension="0.079\" L x 0.049\" W (2.00mm x 1.25mm)", Supplier 1=DigiKey
U1 U4: library part CMP-0272-01669-3, "11 MHz, Single Supply, Low Noise, Precision, Rail-to-Rail Output, JFET Amplifier, 4.5 to 36 V, -40 to 125 degC, 14-pin SOP (PW14), Green (RoHS & no Sb/Br)", manufacturer="Texas Instruments", Rating=Catalog, Total Supply Voltage(Max)(+5V is 5, +/-5V is 10)=36, Total Supply Voltage(Min)(+5V is 5, +/-5V is 10)=4.5, CMRR(Min)(dB)=126, Code_JEDEC=MO-153, componentlink1description="Manufacturer URL", componentlink1url=http://www.ti.com/, componentlink2description=Datasheet, componentlink2url=http://www.ti.com/lit/ds/symlink/opa4140.pdf, ComponentLink3Description="Package Specification", ComponentLink3URL=http://www.ti.com/litv/pdf/mpds360, DatasheetVersion=SBOS498A, Eco-Plan="Green (RoHS & no Sb/Br)", GBW(Typ)(MHz)=11, IIB(Max)(pA)=10, Iq per channel(Max)(mA)=2, Mounting Technology="Surface Mount", Number of Channels=4, Offset Drift(Typ)(uV/C)=0.35, PackageDescription="14-Pin Plastic Small Outline, Body 5 x 4.4 mm, Pitch 0.65 mm", PackageReference=PW0014A, PackageVersion="4040064-3/G, 02/2011", Packing="LARGE T&R", PartNumber=OPA4140AIPWR, Slew Rate(Typ)(V/us)=20, Sub Family="High Supply Voltage Amplifier (>=30V), Low Input Bias Current Amp (<=10pA), Low Noise Amp (<=10nV/rtHz), Low Offset Voltage Amplifier (<=500uV), Precision Amplifier", Vio (25C)(Max)(mV)=0.12
U2 U3: library part CMP-04918-000121-1, "IC REG BUCK ADJUSTABLE 6A 30WQFN", Ambient Temperature Range High=+125°C, Ambient Temperature Range Low=-40°C, manufacturer="Texas Instruments", Max Junction Temp=+150°C, Max Supply Voltage=36V, Min Supply Voltage=3.5V, Nominal Supply Current=15uA, Output Current=6A, Output Voltage=1-34V, Package=RNP0030A, Switching Frequency=350-2200kHz, Temperature="-40°C to +125°C", Automotive=Yes, Automotive Grade="Grade 1", Category=IC, componentlink2description=Datasheet, componentlink2url=http://www.ti.com/lit/ds/symlink/lm73605-q1.pdf, Device Class L1="Integrated Circuits (ICs)", Device Class L2="Power Management ICs", Device Class L3="Voltage Regulators - Switching", Digikey Description="IC REG BUCK ADJUSTABLE 6A 30WQFN", Height=0.8mm, Lead Free=Yes, Manufacturer Part Number=LM73606QRNPTQ1, Max Duty Cycle=97.5%, Mouser Description="3.5V to 36V, 6A Synchronous Step-Down Voltage Converter 30-WQFN -40 to 125", Number Of Outputs=1, Octopart=https://octopart.com/lm73606qrnptq1-texas+instruments-87960447, Output Type=AdjustableProgrammable, RoHS=TRUE, Standoff Height=0mm, Switching Topology=Buck, Temperature Range High=+125°C, Temperature Range Low=-40°C
U5: library part CMP-00004-1, "Comparator Push pull output", partid=2
U6: library part CMP-00001-1, "Comparator quad", partid=1
U7: library part CMP-1627-00175-2, "Automotive Catalog Quad 2-Input Positive-NAND Gates, D0014A, LARGE T&R", F @ Nom Voltage(Max)(Mhz)=70, Generic Part Number=SN74HC00-Q1, ICC @ Nom Voltage(Max)(mA)=0.02, manufacturer="Texas Instruments", Operating Temperature Range(C)="-40 to 125", Rating=Automotive, tpd @ Nom Voltage(Max)(ns)=23, Voltage(Nom)(V)=5, Bits(#)=4, Code_JEDEC=MS-012, DatasheetVersion=SCLS575, Input Type=CMOS, Output Drive (IOL/IOH)(Max)(mA)=5.2/-5.2, Output Type=CMOS, PackageReference=D0014A, Schmitt Trigger=No, Technology Family=HC, VCC(Max)(V)=6, VCC(Min)(V)=2

## Via types
v1: diameter 18, hole 10, Top Layer to Bottom Layer, 102 vias
v2: diameter 16, hole 8, Top Layer to Bottom Layer, 2 vias

## Nets (pads, with @x,y where several pads share a name; then routed paths per layer and width w, separated by ;. In a path a pad name is that pad's centre, name@x,y a point inside that pad or via, vN(x,y) a via of type N, cw(c..) or ccw(c..) an arc to the next point about the centre after c; other vN are vias at no path point)
D_gnd: C16.2 IC2.2 IC2.8 J3.2 | length 1280.5
  Top Layer w10: J3.2 1064.96,629.92 1099.88,664.84 C16.2 1266.39,575.73 1272.25,569.88 IC2.2 1479.58,569.88 1485.43,564.02 1485.43,426.33 1479.58,420.47 1427.97,420.47 IC2.8
"EN (IN)": IC2.3 J3.4 | length 1139.8
  Top Layer w10: J3.4 646.85,866.14 727.95,785.04 1059.06,785.04 1059.45,785.43 v1(1069.68,775.2) ; v1(1093.31,596.46) 1144.93,544.84 IC2.3
  Bottom Layer w10: v1(1069.68,775.2) 1069.68,746.69 1093.31,723.07 v1(1093.31,596.46)
GND: C1.2 C2.1 C3.1 C13.1 C15.1 C17.1 C18.1 C19.2 C20.1 C21.1 Cbias1.1 CBulk1.2 CBulk2.2 Cin1.2 Cin2.2 Cin3.2 Cin4.2 Cout1.2 Cout2.1 Cout3.2 Cout4.1 CVcc1.2 CVcc2.2 IC1.1 IC1.2 IC1.3 IC1.5 IC2.9 IC2.15 J1.2 J2.1 Q3.2 R10.1 R14.2 R18.1 R23.1 R30.2 R41.2 R44.1 R48.2 R49.2 Rfreq1.1 Rfreq2.1 U1.11 U2.8 U2.12 U2.13 U2.14 U2.15 U2.17 U2.19 U2.23 U2.24 U2.25 U2.26 U2.27 U2.28 U2.29 U2.30 U2.31 U3.8 U3.12 U3.13 U3.14 U3.15 U3.17 U3.19 U3.23 U3.24 U3.25 U3.26 U3.27 U3.28 U3.29 U3.30 U3.31 U4.11 U5.12 U6.12 U7.7 | length 4157.6
  Top Layer w10: R10.1@1414.45,2735 1419.45,2740 v1(1440,2740) ; 1421.07,2893.93 1445.59,2893.93 U2.8 ; 1445,1456.7 U3.8 ; U3.30 U3.29 1535.43,1608.39 ; U3.31@1529.73,1489.79 U3.31@1535.43,1495.5 ; U3.31 U3.31@1535.43,1536.5 ; U3.31@1536.81,1493.24 1573.74,1417.32 U3.17 ; U2.31@1545.28,2863.2 U2.31@1554.06,2854.42 ; U3.27 U3.28 1535.43,1608.39 ; U2.17 1552.09,2854.33 U2.31@1545.28,2847.52 ; U3.23 U3.24 U3.25 ; U3.26 U3.25 ; Cin3.2@1710.67,1565 v1(1711.63,1565.96) Cin3.2 ; Cin2.2 1713.94,3003.94 v1(1715,3005) ; v1(1830,3005) 1830.71,3004.29 Cin1.2 ; v1(1850,1565) 1850.39,1565.39 Cin4.2 ; Cbias1.1 1909.45,3470.55 v1(1910,3470) ; v1(2085,3475) 2086.61,3473.39 Cout2.1 ; v1(2105,3025) 2106.3,3023.7 CBulk1.2 ; v1(2320,3390) 2322.83,3392.83 Cout1.2 ; U2.31 1486.22,2903.54 U2.12 U2.13 U2.14 U2.15 U2.31@1545.28,2847.52 ; U2.31 1525.59,2923.23 U2.31@1525.59,2904.55 ; U2.31 U2.31@1525.59,2904.55 ; U2.31@1525.59,2904.55 U2.31@1545.28,2847.52 ; U3.31@1535.43,1536.5 1535.43,1608.39 ; U3.31@1535.43,1536.5 1573.74,1574.8 U3.25
  Top Layer w15: U3.8 1499.63,1456.69 1529.73,1486.8 U3.31@1529.73,1489.79 ; U3.31@1568.74,1456.7 U3.19@1605.35,1456.7
  Top Layer w20: Rfreq1.1 1030,2836.1 v1(1030,2915) ; CVcc1.2 1031.5,2916.5 v1(1030,2915) ; v1(1070,1470) CVcc2.2@1103.86,1470 ; Rfreq2.1 1100,1385.24 1100,1466.14 CVcc2.2@1103.86,1470 ; CVcc2.2 CVcc2.2@1103.86,1470 ; 1415,2890 1175,2890 1150,2915 v1(1030,2915) ; v1(1425,1455) 1441.52,1455 ; U3.31@1517.75,1472.33 ccw(c1605.91,1425.11) 1505.91,1425.11 U3.12 U3.13 U3.14 ; U3.31@1536.15,1495.22 U3.31@1568.74,1456.7 ; R18.1 1545.28,1296.1 U3.14 ; U3.15 U3.14 ; v1(1633.86,413.39) IC2.9 ; IC2.15 v1(1673.23,570.87) ; C15.1 1797.73,668.78 1901.73,668.78 C18.1 1909.45,677.17 v1(1909.45,708.66) ; C17.1 v1(1909.45,531.5) ; v1@2019.68,2027.56 2019.68,2025.32 v1(2020,2025) ; v1(2125,1590) 2125.98,1589.02 CBulk2.2 ; Q3.2 3485.08,3051.18 v1(3523.62,3051.18) ; R14.2 v1(3503.94,3149.61) ; v1(3562.99,1594.49) 3614.33,1571.69 R41.2 ; R30.2 v1(3562.99,2283.46) ; v1(3622.05,2283.46) C13.1 ; U1.11 v1(4173.23,2145.67) ; v1(4214.96,1372.83) 4216.93,1374.8 C21.1 ; v1(4370.08,2696.85) 4396.18,2722.95 4436.18,2722.95 4448.82,2735.59 R23.1 4437.01,2736.22 C1.2 IC1.3 IC1.2 IC1.1 4446.85,3009.84 4484.25,2972.44 IC1.5 4606.04,2972.44 4622.93,2955.55 4629.57,2955.55 4630.24,2954.88 4649.45,2954.88 U4.11 ; v1(4601.18,1003.54) 4601.38,1003.74 R48.2 ; v1(4677.17,1153.54) 4677.56,1153.94 U7.7 ; v1(4874.41,1460.24) 4869.69,1460.24 C19.2 4866.14,1454.72 4895.67,1425.2 U5.12 ; C3.1 5059.06,2992.13 v1(5059.06,3051.18) 5059.06,3092.68 C2.1 C2.1@5078.58,3110.24 ; R49.2@5121.22,1365.98 5133.86,1353.35 R49.2 v1(5137.8,1377.95) ; v1(5807.09,1929.13) 5823.43,1929.13 J1.2
  Bottom Layer w20: 1030,2885 v1(1030,2915) ; v1(1070,1470) 1270,1470 1285,1455 v1(1425,1455) ; v1(3562.99,2283.46) v1(3622.05,2283.46) ; v1(5059.06,3051.18) 5098.43,3051.18
  other v1: 5142.72,748.03 3472.44,1122.05
NetC2_2: C2.2 IC1.6 U4.5 | length 796.5
  Top Layer w10: IC1.6 4541.42,3009.84 4547.24,3015.67 4547.24,3084.69 4553.1,3090.55 v1(4704.72,3090.55) ; U4.5@4878.86,2981.22 4894.61,2981.22 4899.53,2986.14 4902.56,2986.14 4908.55,2992.13 ; v1(4940.94,2992.13) 4908.55,2992.13 ; C2.2 5000,3108.27 4940.99,3049.25 4940.99,3024.57 4908.55,2992.13
  Bottom Layer w10: v1(4704.72,3090.55) 4940.94,3090.55 v1(4940.94,2992.13)
NetC4_1: C4.1 C5.1 C6.1 Q3.3 Q4.3 | length 1225.9
  Top Layer w10: v1(3366.14,3090.55) 3411.61,3045.08 Q3.3 ; C4.1 C5.1 ; v1(3523.62,3090.55) 3543.31,3110.24 3543.31,3122.05 ; v1(3543.31,3149.61) 3543.31,3122.05 ; Q4.3 3606.3,3059.06 3543.31,3122.05 ; v1(3641.73,3484.25) 3641.73,3510.91 C5.1 ; C6.1 C5.1
  Bottom Layer w10: v1(3366.14,3090.55) v1(3523.62,3090.55) ; v1(3543.31,3149.61) 3543.31,3202.8 3537.45,3208.66 3509.79,3208.66 3503.94,3214.52 3503.94,3444.88 3543.31,3484.25 v1(3641.73,3484.25)
NetC4_2: C4.2 C5.2 C6.2 Q1.3 Q2.2 Q2.4 | length 762.5
  Top Layer w10: Q2.2 3144.9,3581.47 3390.53,3581.47 Q2.4 3403.54,3594.49 C4.2 C5.2 C6.2 3802.09,3592.71 3888.27,3592.71 Q1.3
NetC7_1: C7.1 Q5.3 R3.1 | length 744
  Top Layer w10: R3.1 2751.97,2957.68 2734.33,2940.04 2734.33,2936.1 2665.35,2867.13 C7.1 2685.94,2774.69 2685.94,2727.44 2755.91,2657.48 2803.11,2657.48 2807.13,2661.5 2879.98,2661.5 2886.24,2655.24 2978.26,2655.24 3000.19,2677.17 Q5.3 Q5.3@3109.06,2677.17
NetC7_2: C7.2 Q6.1 R5.1 | length 506
  Top Layer w10: C7.2 2748.94,2774.69 2748.94,2732.79 2765.2,2716.54 2838.98,2716.54 Q6.1 2852.68,2721.77 v1(2952.76,2834.65) ; v1(3011.81,2893.7) 3049.29,2940.04 R5.1
  Bottom Layer w10: v1(2952.76,2834.65) v1(3011.81,2893.7)
NetC8_1: C8.1 Q5.1 R4.1 | length 570.9
  Top Layer w10: R4.1 2934.96,2940.04 v1(3051.18,2795.28) C8.1@3228.35,2795.28 ; v1(2992.13,2716.54) 2993.01,2715.65 3036.71,2715.65 Q5.1@3037.38,2714.98
  Bottom Layer w10: v1(2992.13,2716.54) 2992.13,2789.42 2997.98,2795.28 v1(3051.18,2795.28)
NetC8_2: C8.2 Q6.3 R6.1 R8.2 R9.2 R11.1 R13.1 | length 1974.2
  Top Layer w10: Q6.3 2912.2,2677.17 2948.76,2713.72 2948.76,2726.36 2978.3,2755.91 3169.29,2755.91 3169.29,2736.22 3287.4,2736.22 3287.4,2795.28 C8.2@3291.34,2795.28 ; R8.2 2937.99,3677.17 2874.02,3613.19 2874.02,3515.65 2885.73,3503.94 3011.08,3503.94 3041.52,3493.91 3069.22,3484.38 v1(3070.87,3484.25) ; v1(3149.61,3405.51) 3149.61,3368.03 3127.05,3368.03 3138.37,3354.74 R9.2 R11.1 3238.19,3173.27 3307.09,3104.37 3307.09,2958.61 3301.23,2952.76 R6.1@3234.37,2952.76 ; R6.1 R6.1@3234.37,2952.76 ; R13.1 3387.87,2795.28 C8.2 3278.62,2817.83 3249.92,2940.04 R6.1@3234.37,2952.76
  Bottom Layer w10: v1(3070.87,3484.25) v1(3149.61,3405.51)
NetC14_1: C14.1 R32.1 R34.1 U4.2 | length 441.9
  Top Layer w10: U4.2 5051.18,2901.57 C14.1 5054.13,2834.65 R34.1 R32.1
NetC17_2: C17.2 R38.2 R39.1 | length 331.4
  Top Layer w10: R38.2 1906.5,437.99 C17.2 1975.59,440.94 2012.2,477.56 2086.42,477.56 R39.1
NetCBOOT1_1: CBOOT1.1 L2.1 U2.1 U2.2 U2.3 U2.4 U2.5 | length 240
  Top Layer w10: CBOOT1.1 CBOOT1.1@1302.09,3062.09 ; U2.5 U2.4 U2.3 U2.2 U2.1
  Top Layer w20: L2.1 L2.1@1220.31,3466.69 ; CBOOT1.1@1261.97,3098.27 CBOOT1.1
NetCBOOT1_2: CBOOT1.2 U2.6 | length 233.9
  Top Layer w10: CBOOT1.2 1279.53,2965.47 1311.93,2933.07 U2.6
NetCBOOT2_1: CBOOT2.1 L3.1 U3.1 U3.2 U3.3 U3.4 U3.5 | length 96.5
  Top Layer w10: L3.1 L3.1@762.6,1955.29 ; U3.5 U3.4 U3.3 U3.2 U3.1
NetCBOOT2_2: CBOOT2.2 U3.6
NetCff1_1: Cff1.1 R10.2 Rfbt1.1 U2.11 | length 249.4
  Top Layer w10: R10.2 1320.86,2735 1315,2740.86 1315,2795 1354.65,2834.65 U2.11
NetCff2_1: Cff2.1 R17.1 R18.2 R27.1 U3.11
NetCff2_2: Cff2.2 Cout3.1 Cout4.2 L3.2 R17.2
NetCVcc1_1: CVcc1.1 U2.7 | length 385.2
  Top Layer w10: CVcc1.1 1137.87,2992.13 1215,2915 1220,2915 1221.61,2913.39 1410.21,2913.39 1411.75,2914.92 1428.25,2914.92 1429.56,2913.61 1445.59,2913.61 U2.7
NetCVcc2_1: CVcc2.1 U3.7 | length 292.5
  Top Layer w10: CVcc2.1 1434.73,1476.38 1434.98,1476.62 1451.59,1476.62 1451.84,1476.38 U3.7
NetIC2_11: IC2.11 U5.1 | length 3700.7
  Top Layer w10: IC2.11 1685.92,469.88 1693.35,462.45 1693.35,382.75 1707.95,368.15 3919.33,368.15 4507.48,956.3 4648.08,956.3 4653.94,962.16 4653.94,1109.5 4665.31,1120.87 v1(4765.75,1120.87) ; v1(4819.29,1144.49) 4843.7,1144.49 U5.1
  Bottom Layer w10: v1(4765.75,1120.87) 4789.37,1144.49 v1(4819.29,1144.49)
NetIC2_12: IC2.12 R48.1 U7.5 | length 3426.6
  Top Layer w10: IC2.12 1701.27,494.84 1708.27,487.84 1708.27,388.93 1714.13,383.07 3911.61,383.07 4510.91,982.36 4514.84,982.36 4532.48,1000 R48.1 4532.48,1064.37 4577.56,1109.45 U7.5
NetIC2_14: IC2.14 U7.9 | length 3477.7
  Top Layer w10: IC2.14 1716.1,544.84 1780.32,609.06 2039.37,609.06 v1(2040.16,608.27) ; v1(4194.49,1126.77) 4370.87,1303.15 v1(4545.67,1303.15) ; v1(4625.2,1304.72) 4626.38,1305.91 4626.38,1362.01 U7.9
  Bottom Layer w10: v1(2040.16,608.27) 3878.27,608.27 4125,855 4125,1057.28 v1(4194.49,1126.77) ; v1(4545.67,1303.15) 4546.46,1303.94 4624.41,1303.94 v1(4625.2,1304.72)
NetQ1_1: Q1.1 R7.1 | length 116.9
  Top Layer w10: R7.1@3950.59,3466.46 3952.48,3464.57 R7.1@3956.69,3464.57 ; R7.1 3966.57,3466.46 3966.57,3547.91 Q1.1
NetQ1_2: Q1.2 Q4.2 Q4.4 R15.2 | length 1015.8
  Top Layer w10: Q4.2 3622.05,3149.61 3650.51,3149.61 3829.8,3149.61 Q4.4 4062.01,3149.61 R15.2 4070.87,3158.46 4070.87,3598.82 4039.57,3630.12 Q1.2
NetQ2_1: Q2.1 R8.1 | length 137.8
  Top Layer w10: R8.1 3024.53,3675.21 3109.33,3675.21 Q2.1
NetQ2_3: Q2.3 R1.2 | length 158.4
  Top Layer w10: R1.2 3024.53,3541.42 3109.33,3516.65 Q2.3
NetQ3_1: Q3.1 R13.2 | length 179.7
  Top Layer w10: R13.2 3474.86,2816.85 3474.86,2967.2 Q3.1
NetQ4_1: Q4.1 R12.2 | length 186.4
  Top Layer w10: R12.2 3509.47,3346.46 3579.27,3276.65 3579.27,3267.19 3606.3,3240.16 Q4.1
NetQ5_2: Q5.2 Q6.2 | length 196.9
  Top Layer w10: Q6.2 Q5.2
NetR2_2: R2.2 R7.2 R9.1 | length 1011.2
  Top Layer w10: R9.1 3058.15,3368.03 3024.53,3423.31 R2.2 3024.53,3444.88 v1(3543.31,3444.88) ; v1(3779.53,3444.88) 3880,3444.88 R7.2
  Bottom Layer w10: v1(3543.31,3444.88) v1(3779.53,3444.88)
NetR11_2: R11.2 R12.1 R14.1 | length 300.2
  Top Layer w10: R11.2 R12.1 R14.1
NetR16_1: R16.1 R29.2 | length 371.9
  Top Layer w10: R29.2 4744.09,2736.22 4940.94,2539.37 R16.1
NetR19_1: R19.1 R24.1 U1.12 | length 221.5
  Top Layer w10: U1.12 4130.83,2174.13 4162.32,2174.13 4178.99,2190.8 cw(c4212.6,2157.2) R19.1 4230.24,2226.3 4232.23,2245.42 ccw(c4222.28,2246.46) 4232.28,2246.45 4232.28,2301.26 R24.1
NetR20_1: R20.1 R25.1 U1.3 | length 1011.4
  Top Layer w10: U1.3 3919.67,2171.63 v1(3953.16,2188.58) ; R25.1 4371.97,1791.34 4407.98,1791.34 ccw(c4407.98,1801.34) 4409.5,1791.45 4486.3,1803.23 R20.1
  Top Layer w15: v1(4271.65,1751.97) 4302.17,1751.97 4346.46,1796.26 R25.1
  Bottom Layer w10: v1(3953.16,2188.58) 3953.16,1853.93 3996.06,1811.02 4212.6,1811.02 v1(4271.65,1751.97)
NetR21_1: R21.1 U1.5 | length 316.6
  Top Layer w10: v2(3838.58,2086.61) 3869.92,2117.95 3901.42,2117.95 U1.5 ; v2(3858.27,1968.5) 3877.95,1948.82 R21.1
  Bottom Layer w10: v2(3838.58,2086.61) 3838.58,1988.19 v2(3858.27,1968.5)
NetR22_1: R22.1 U1.10 | length 317.1
  Top Layer w10: U1.10 4173.23,2120.08 v1(4173.23,2121.75) ; v1(4173.23,1929.13) 4191.02,1882.8 R22.1
  Bottom Layer w10: v1(4173.23,1929.13) v1(4173.23,2121.75)
NetR23_2: R23.2 R29.1 U4.3 | length 467.3
  Top Layer w10: R23.2 4613.27,2736.22 R29.1 4748.58,2927.84 4840.3,2936.63 4857.36,2930.04 U4.3
NetR25_2: R25.2 R33.1 U1.7 | length 771.4
  Top Layer w10: R33.1 3781.22,1963 3884.92,2066.02 U1.7 3903.54,2001.97 v1(3976.38,1929.13) ; v1(4271.65,1889.76) 4273.82,1889.76 4280.79,1882.8 4332.76,1882.8 R25.2
  Bottom Layer w10: v1(3976.38,1929.13) 4133.86,1929.13 4153.54,1909.45 4153.54,1895.62 4159.4,1889.76 v1(4271.65,1889.76)
NetR26_1: R26.1 R33.2 U1.6 | length 465.8
  Top Layer w10: R33.2 3781.22,2031.9 3884.92,2091.61 U1.6 3948.82,2094.49 4020.67,2022.64 R26.1
NetR26_2: R26.2 R36.1 U1.8 | length 419.4
  Top Layer w10: R26.2 4089.57,1874.02 4127.95,1912.4 U1.8 4173.23,2068.9 4173.23,1968.5 R36.1
NetR27_2: R27.2 R35.1 U1.1 | length 2973.7
  Top Layer w10: R27.2 1552.52,1085 v1(1685,1085) ; v1(1860,1090) 2800,1090 3660,1950 3660,2159.5 3665.86,2165.35 R35.1 3765,2170.51 3765,2214.14 3773.3,2222.44 U1.1
  Bottom Layer w10: v1(1685,1085) 1855,1085 v1(1860,1090)
NetR28_1: R28.1 R36.2 U1.9 | length 305.1
  Top Layer w10: U1.9 4171.26,2094.49 4228.35,2037.4 R36.2 R28.1
NetR28_2: R28.2 R37.1 U1.14 U6.4 U6.7 | length 2624.2
  Top Layer w10: U6.4 3622.05,1272.05 3635,1285 3692.96,1285 3698.82,1279.14 ; U6.7 3698.82,1279.14 ; U1.14 4112.2,2222.44 4109.33,2225.32 4109.33,2245.32 4108.63,2246.02 4108.63,2257.92 4114.49,2263.78 4119.7,2263.78 ; v1(4153.54,2263.78) 4119.7,2263.78 ; R37.1@4204.8,2440.94 R37.1 4163.28,2460.63 4133.59,2430.94 4133.59,2291.69 4119.7,2277.8 4119.7,2263.78 ; v1(4271.65,2263.78) 4403.59,2263.78 4409.45,2257.92 R28.2 4410.75,2105 v1(4475,2105) ; v1(4570,2105) 4570,1680.86 4564.14,1675 4094.68,1675 3698.82,1279.14
  Bottom Layer w10: v1(4153.54,2263.78) v1(4271.65,2263.78) ; v1(4475,2105) v1(4570,2105)
NetR30_1: R30.1 R35.2 U1.2 | length 377.6